# Altium PCB POE.PcbDoc (part 1 of 2)
Units mm, origin at the board's own origin, x right, y up, seen from the top; angles counter-clockwise.
Board outline 57 x 14 mm, 4 copper layers (Top Layer, Layer 1, Layer 2, Bottom Layer), stack 1.571 mm thick; 65 components, 45 nets, 184 pads, 214 vias.
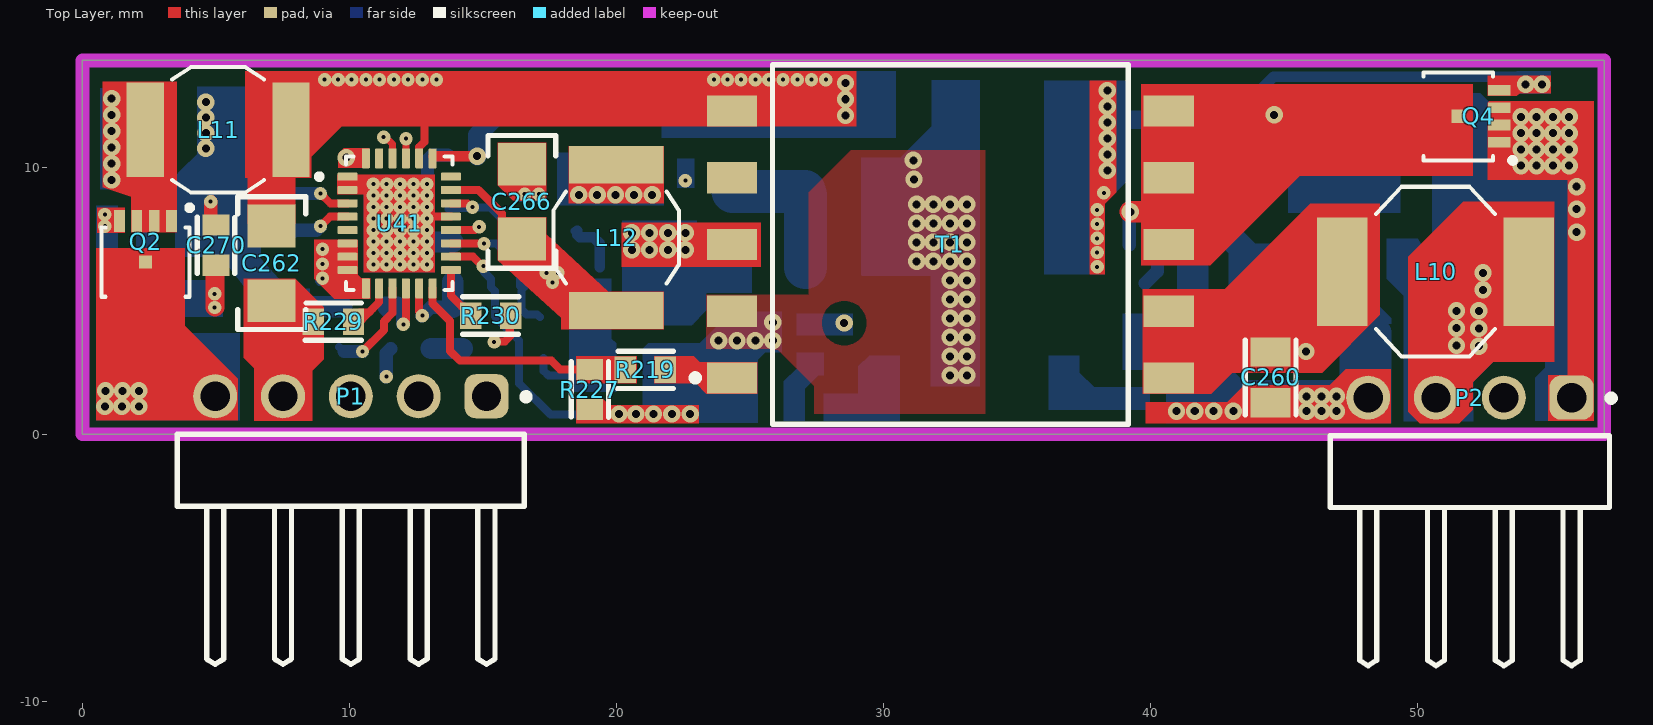
[diagram p0: Top Layer view]
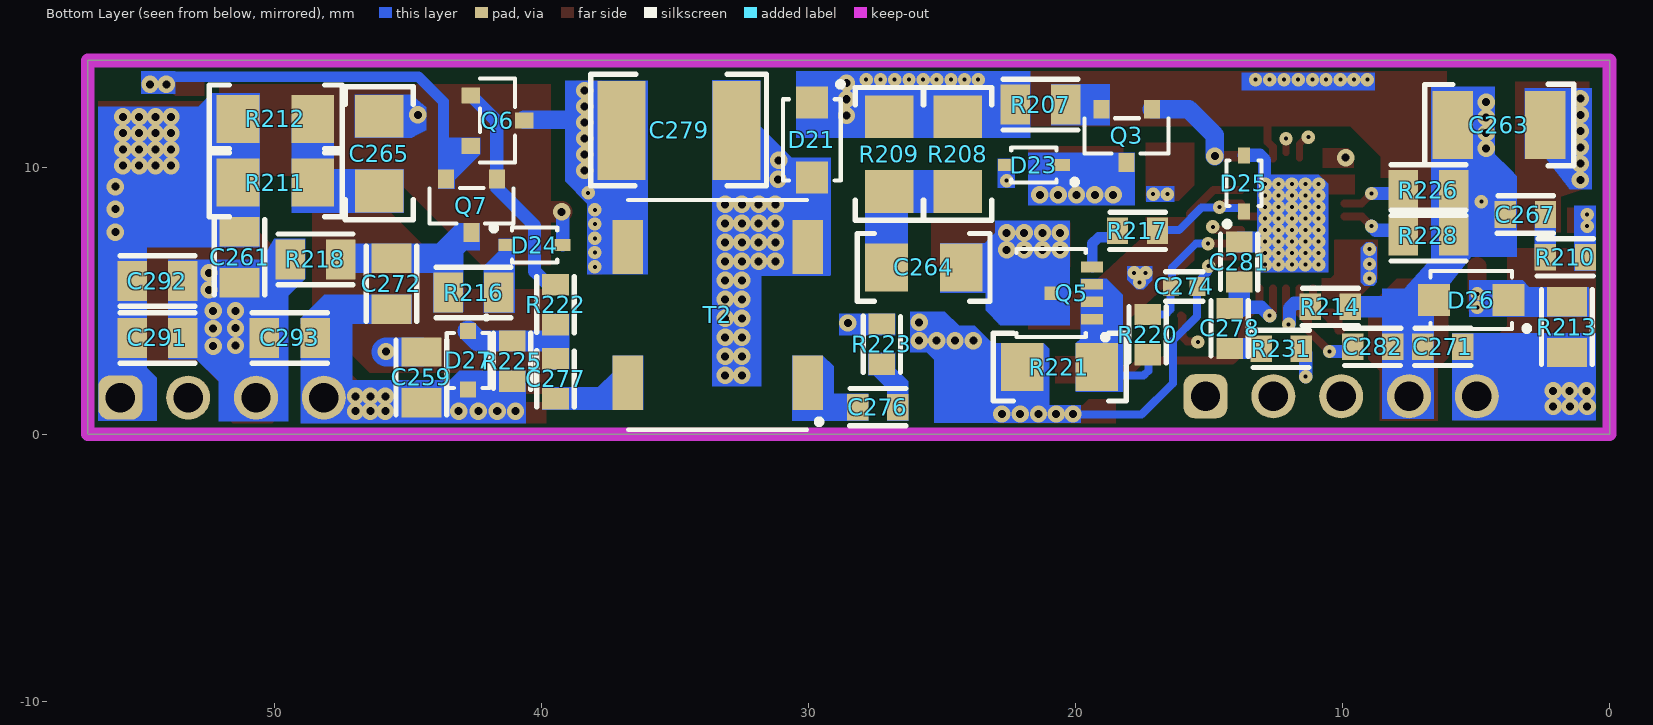
[diagram p1: Bottom Layer view, seen from below]
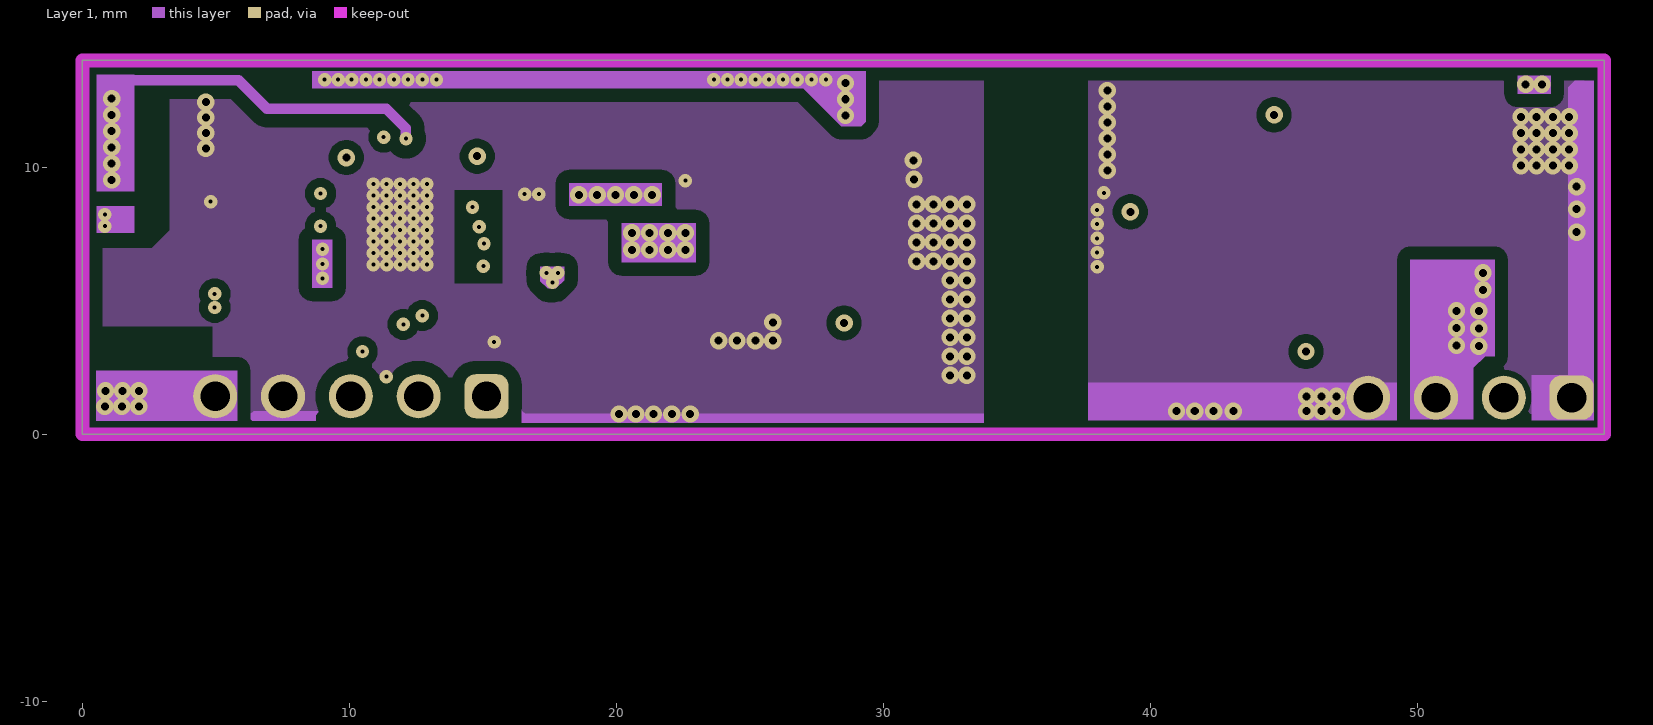
[diagram p2: Layer 1]
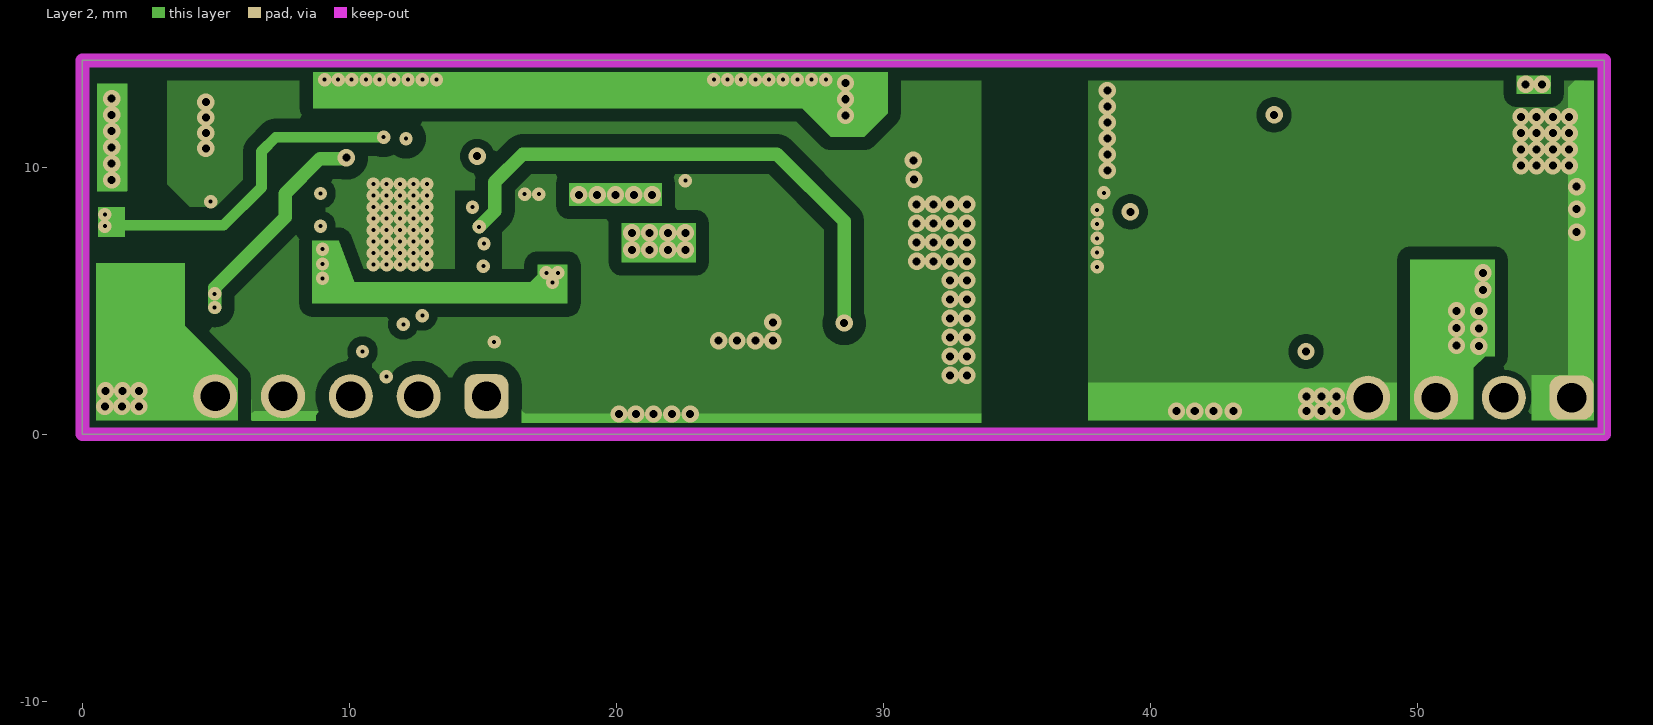
[diagram p3: Layer 2]
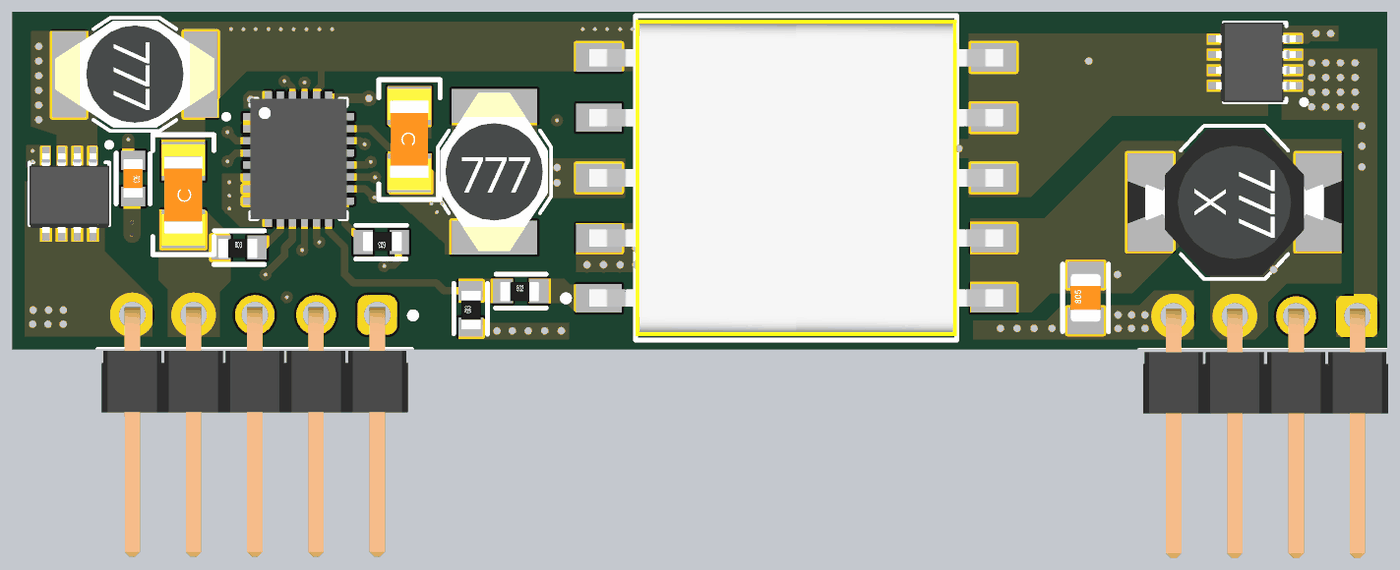
[diagram p4: 3D render of the assembled board from above, using the file's embedded part models]
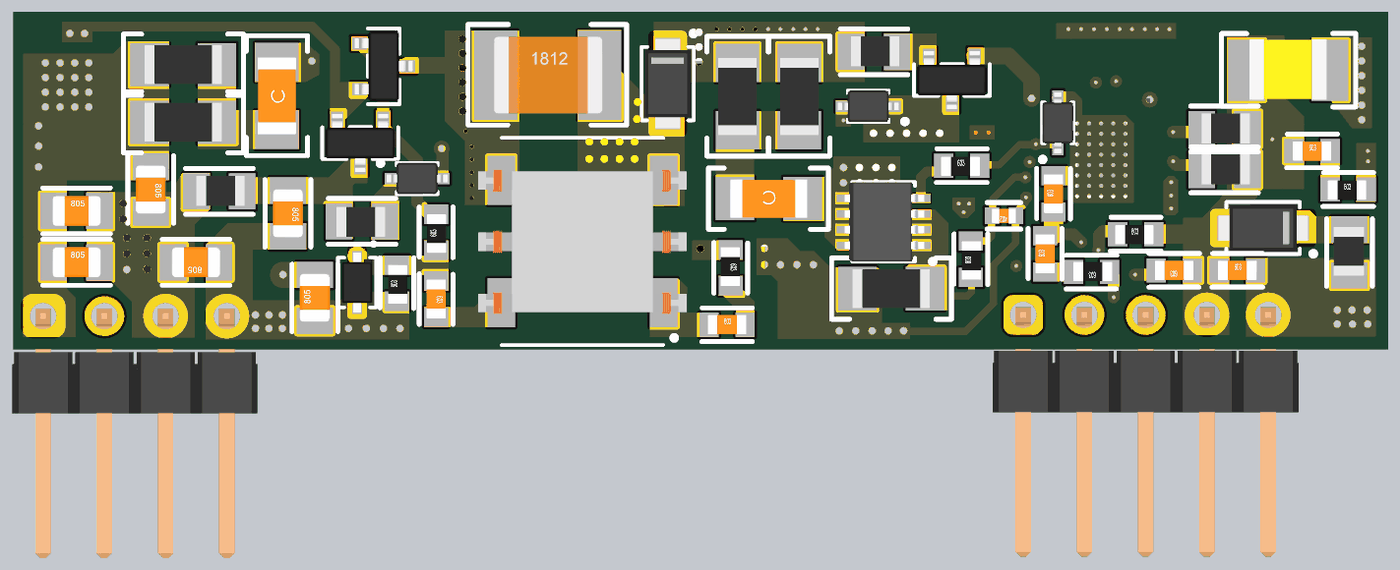
[diagram p5: 3D render of the assembled board from below, using the file's embedded part models]

## Layer stack, top to bottom
Top Solder: solder mask 0.0102, Solder Resist, Dk 3.5
Top Layer: signal copper 0.0356
Dielectric 2: prepreg 0.18, PR7628, Dk 4.1
Dielectric 4: prepreg 0.18, PR7628, Dk 4.1
Layer 1: signal copper 0.035
Dielectric 1: core 0.71, FR4-Improved, Dk 4.6
Layer 2: signal copper 0.035
Dielectric 5: prepreg 0.18, PR7628, Dk 4.1
Dielectric 3: prepreg 0.18, PR7628, Dk 4.1
Bottom Layer: signal copper 0.0356
Bottom Solder: solder mask 0.0102, Solder Resist, Dk 3.5

## Board outline
0,0 0,14 57,14 57,0

## Design rules (kind name [scope] priority, off if disabled: settings)
BoardOutlineClearance Edge_Via_Clearance_Top [OnLayer('Top Layer')] p1: gap=0.3 ignorepadtopadclearanceinfootprint=FALSE
BoardOutlineClearance Edge_Via_Clearance_Bottom [OnLayer('Bottom Layer')] p2: gap=0.3 ignorepadtopadclearanceinfootprint=FALSE
BoardOutlineClearance Edge_Via_Clearance_L1 [OnLayer('Layer 1')] p3: gap=0.4 ignorepadtopadclearanceinfootprint=FALSE
BoardOutlineClearance Edge_Via_Clearance_L2 [OnLayer('Layer 2')] p4: gap=0.4 ignorepadtopadclearanceinfootprint=FALSE
Clearance Clearance_TOP_POE_GND [InNamedPolygon('TOP_POE_GND')] p1: gap=0.5 ignorepadtopadclearanceinfootprint=FALSE
Clearance Clearance_L1_POE_GND [InNamedPolygon('L1_POE_GND')] p2: gap=0.5 ignorepadtopadclearanceinfootprint=FALSE
Clearance Clearance_L2_POE_GND [InNamedPolygon('L2_POE_GND')] p3: gap=0.5 ignorepadtopadclearanceinfootprint=FALSE
Clearance Clearance_L1_GND [InNamedPolygon('L1_GND')] p4: gap=0.5 ignorepadtopadclearanceinfootprint=FALSE
Clearance Clearance_L2_GND [InNamedPolygon('L2_GND')] p5: gap=0.5 ignorepadtopadclearanceinfootprint=FALSE
Clearance [All] p6: gap=0.15 ignorepadtopadclearanceinfootprint=FALSE
HoleSize [All] p1: absolutevalues=TRUE maxlimit=2.54 minlimit=0.15 maxpercent=80.000 minpercent=20.000
HoleToHoleClearance [All] p1: gap=0.25 allowstackedmicrovias=TRUE
MinimumAnnularRing [All] p1: minimumring=0.125
MinimumSolderMaskSliver [All] p1: minsoldermaskwidth=0.07
NetAntennae [All] p1: netantennaetolerance=1.7
PlaneClearance [All] p1: clearance=0.5
PlaneConnect [All] p1: planeconnectstyle=Direct reliefexpansion=0.508 reliefentries=4 reliefconductorwidth=0.254 reliefairgap=0.254
PolygonConnect [All] p1: connectstyle=Direct reliefconductorwidth=0.254 reliefentries=4 polygonreliefangle="90 Angle" airgapwidth=0.254
RoutingVias [All] p1: holewidth=0.15 width=1.27 viastyle="Through Hole" minholewidth=0.15 minwidth=0.252 maxholewidth=0.8 maxwidth=1.27
SilkToSilkClearance [All] p1: silktosilkclearance=0.102
SilkToSolderMaskClearance [IsPad] p1: minsilkscreentomaskgap=0.1 clearancetoexposedcopper=TRUE
SolderMaskExpansion [All] p1: expansion=0.102 istentingtop=FALSE
Width [All] p1: maxlimit=4 minlimit=0.254 preferedwidth=0.254 minimp=50.000000 maximp=50.000000 favimp=50.000000
22 further rules are at their usual default settings.

## Components (designator, comment, footprint, x,y, rotation, side; value= is the part's Value field where it differs from the comment)
C259 "10uF" C0805 44.501,2.134 r90 bottom
C260 "10uF" C0805 44.501,2.134 r90 top
C261 "10uF" C0805 51.308,6.629 r270 bottom
C262 "2.2uF" C1206 7.087,6.401 r90 top
C263 "10uF" C1210 4.14,11.582 r180 bottom
C264 "100pF" C1206 25.679,6.248 r0 bottom
C265 "470pF" C1206 46.076,10.516 r90 bottom
C266 "10uF" C1206 16.459,8.712 r270 top
C267 "10nF" C0603 3.15,8.23 r180 bottom
C270 "47nF" C0603 5.004,7.087 r270 top
C271 "100nF" C0603 6.248,3.277 r180 bottom
C272 "1uF" C0805 45.618,5.639 r270 bottom
C274 "DNP" C0402 15.926,5.537 r0 bottom value=10nF
C276 "1uF" C0603 27.407,1.016 r180 bottom
C277 "2.2nF" C0603 39.472,2.083 r270 bottom
C278 "3.3nF" C0603 14.224,3.962 r90 bottom
C279 "4.7nF" C1812 34.849,11.379 r180 bottom
C281 "220pF" C0603 13.868,6.452 r90 bottom
C282 "100nF" C0603 8.865,3.277 r0 bottom
C291 "10uF" C0805 54.381,3.607 r180 bottom
C292 "10uF" C0805 54.381,5.74 r180 bottom
C293 "10uF" C0805 49.428,3.607 r0 bottom
D21 "PTVS58VS1UR" SOD123W 29.87,11.024 r270 bottom
D23 "BAV19WS" SOD323 21.556,10.084 r0 bottom
D24 "DNP" SOD323 40.259,7.087 r180 bottom
D25 "PMEG1020EA" SOD323 13.691,9.398 r90 bottom
D26 "PTVS58VS1UR" SOD123W 5.182,5.029 r0 bottom
D27 "BAT46WJ" SOD323F 42.748,2.769 r270 bottom
L10 "180 nH" IND_DO1813H_COC 50.673,6.096 r180 top
L11 "10 uH" IND_DO1607B_COC 5.08,11.405 r180 top
L12 "100 uH" IND_DO1607B_COC 19.99,7.366 r270 top
P1 "61300511021" 61300511021 10.05,-1.346 r0 top
P2 "61300411021" 61300411021 51.96,-1.397 r0 top
Q2 "PSMN075-100MSE" SOT1210 2.362,6.452 r270 top
Q3 "PBSS9110T" SOT23 18.085,11.227 r0 bottom
Q4 "TPN1600ANH" SOT1210 51.526,11.907 r180 top
Q5 "BSZ900N20NS3" SOT1210 20.915,5.288 r0 bottom
Q6 "MMBT3906" SOT23 41.697,11.745 r270 bottom
Q7 "MMBT3904" SOT23 42.621,8.611 r0 bottom
R207 "20R" R0805 21.311,12.344 r0 bottom
R208 "200R" R1206 24.409,10.49 r90 bottom
R209 "200R" R1206 26.975,10.49 r90 bottom
R210 "3.3k" R0603 1.651,6.629 r180 bottom
R211 "27R" R1206 49.962,9.423 r180 bottom
R212 "27R" R1206 49.962,11.811 r180 bottom
R213 "8.2R" R0805 1.6,4.013 r270 bottom
R214 "7.5k" R0603 10.465,4.775 r180 bottom
R216 "DNP" R0805 42.545,5.309 r180 bottom value=1k
R217 "0R" R0603 17.678,7.62 r180 bottom
R218 "0R" R0805 48.463,6.553 r0 bottom
R219 "6.65k" R0603 21.082,2.413 r0 top
R220 "0R" R0603 17.297,3.734 r90 bottom
R221 "0.025R" R1206 20.599,2.515 r180 bottom
R222 "15R" R0603 39.472,4.851 r90 bottom
R223 "100R" R0603 27.254,3.378 r270 bottom
R225 "10k" R0603 41.097,2.743 r90 bottom
R226 "37.4R" R0805 6.782,9.144 r0 bottom
R227 "2.2k" R0603 18.999,1.676 r90 top
R228 "1k" R0805 6.782,7.442 r0 bottom
R229 "107k" R0603 9.398,4.216 r0 top
R230 "DNP" R0603 15.291,4.445 r180 top value=51k
R231 "26.1k" R0603 12.294,3.2 r0 bottom
T1 "750316115" WE-PoE+_EP13_L17.75W13.46H12.7 32.5,7.112 r0 top
T2 "PE-68386NLT" SOP254P864X249-6N 33.401,4.47 r0 bottom
U41 "LT4295IUFD" QFN-29_UFD 11.862,7.899 r0 top

## Footprints (in the part's own frame and the unit in brackets; to place one, negate y for a bottom-side part, rotate by r counter-clockwise, add the part's x,y. Pads: shape width x height; smd on the part's side, far side on the other; paste and mask are expansions set on the pad)
61300411021 [mm]
  rrect50% 1.65x1.65 hole 1.1: 1(3.81,2.77)
  round 1.65 hole 1.1: 2(1.27,2.77) 3(-1.27,2.77) 4(-3.81,2.77)
  silkscreen extent -5.23,-7.27 5.42,2.87, body extent -5.08,-7.27 5.08,3.09, height 2.58
61300511021 [mm]
  rrect50% 1.65x1.65 hole 1.1: 1(5.08,2.77)
  round 1.65 hole 1.1: 2(2.54,2.77) 3(0,2.77) 4(-2.54,2.77) 5(-5.08,2.77)
  silkscreen extent -6.5,-7.27 6.69,2.87, body extent -6.35,-7.27 6.35,3.09, height 2.58
C0402 [mm]
  rect 0.6x0.7 smd: 1(-0.5,0) 2(0.5,0)
  silkscreen extent -0.7,-0.55 0.7,0.55, body extent -0.5,-0.3 0.5,0.3, height 0.2
C0603 [mm]
  rect 0.8x1 smd: 1(-0.75,0) 2(0.75,0)
  silkscreen extent -1.05,-0.7 1.05,0.7, body extent -0.8,-0.4 0.8,0.4, height 0.3
C0805 [mm]
  rect 1.1x1.5 smd: 1(-0.95,0) 2(0.95,0)
  silkscreen extent -1.4,-0.95 1.4,0.95, body extent -1,-0.63 1,0.63, height 0.78
C1206 [mm]
  rect 1.6x1.8 smd: 1(-1.4,0) 2(1.4,0)
  silkscreen extent -2.47,-1.27 2.5,1.27, body extent -2.1,-0.9 2.1,0.9, height 0.95
C1210 [mm]
  rect 1.52x2.54 smd: 1(-1.73,0) 2(1.73,0)
  silkscreen extent -2.78,-1.53 2.8,1.53, body extent -1.61,-1.22 1.59,1.28, height 2.5
C1812 [mm]
  rect 1.8x3.7 smd: 1(-2.15,0) 2(2.15,0)
  silkscreen extent -3.3,-2.07 3.27,2.1, body extent -2.22,-1.6 2.28,1.6, height 1.6
IND_DO1607B_COC [mil]
  rect 55x140 smd paste+0: 1(-107.5,0) 2(107.5,0)
  silkscreen extent -68,-92 68,92, body extent -130,-88 130,87, height 115
IND_DO1813H_COC [mil]
  rect 75x160 smd paste+0: 1(-137.5,0) 2(137.5,0)
  silkscreen extent -88,-125 88,125, body extent -175,-120 175,120, height 197
QFN-29_UFD [mm]
  rrect25% 0.75x0.3 smd: 1(-1.935,1.75) 2(-1.935,1.25) 3(-1.935,0.75) 4(-1.935,0.25) 5(-1.935,-0.25) 6(-1.935,-0.75) 7(-1.935,-1.25) 8(-1.935,-1.75) 15(1.935,-1.75) 16(1.935,-1.25) 17(1.935,-0.75) 18(1.935,-0.25) 19(1.935,0.25) 20(1.935,0.75) 21(1.935,1.25) 22(1.935,1.75)
  rrect25% 0.3x0.75 smd: 9(-1.25,-2.435) 10(-0.75,-2.435) 11(-0.25,-2.435) 12(0.25,-2.435) 13(0.75,-2.435) 14(1.25,-2.435) 23(1.25,2.435) 24(0.75,2.435) 25(0.25,2.435) 26(-0.25,2.435) 27(-0.75,2.435) 28(-1.25,2.435)
  rect 0.3x0.3 smd paste-2539.97: 29(0,0)
  Top Layer region: 1.325,-1.825 -1.325,-1.825 -1.325,1.475 -0.975,1.825 1.325,1.825
  silkscreen extent -3.09,-2.5 2,2.5, body extent -2,-2.5 2,2.5, height 0.8
R0603 [mm]
  rect 0.8x1 smd: 1(-0.75,0) 2(0.75,0)
  silkscreen extent -1.05,-0.7 1.05,0.7, body extent -0.85,-0.43 0.75,0.37, height 0.3
R0805 [mm]
  rect 1.1x1.5 smd: 1(-0.95,0) 2(0.95,0)
  silkscreen extent -1.4,-0.95 1.4,0.95, body extent -1.05,-0.65 0.95,0.6, height 0.4
R1206 [mm]
  rect 1.6x1.8 smd: 1(-1.4,0) 2(1.4,0)
  silkscreen extent -2.47,-1.27 2.5,1.27, body extent -1.6,-0.8 1.6,0.8, height 0.5
SOD123W [mm]
  rect 1.2x1.2 smd paste-0.1 mask+0.2: 1(-1.4,0) 2(1.4,0)
  silkscreen extent -2.18,-1.08 1.52,1.17, body extent -1.85,-0.95 1.85,0.95, height 1.1
SOD323 [mm]
  rect 0.6x0.46 smd: 1(-1.05,0) 2(1.05,0)
  silkscreen extent -1.62,-0.65 0.85,0.73, body extent -1.26,-0.65 1.26,0.65, height 1.11
SOD323F [mm]
  rect 0.6x0.6 smd paste-0.1: 1(-1.1,0) 2(1.1,0)
  silkscreen extent -1.63,-0.8 1.03,0.8, body extent -1.25,-0.63 1.25,0.62, height 0.69
SOP254P864X249-6N [mil]
  rect 45x80 smd: 1(-132.5,100) 3(-132.5,-100) 4(132.5,-100) 6(132.5,100)
  silkscreen extent -154,-169 132,169, body extent -170,-118 170,119, height 90
SOT23 [mm]
  rect 0.6x0.7 smd paste-0.05: 1(-0.95,-0.949) 2(0.95,-0.949) 3(0,1.051)
  silkscreen extent -1.57,-0.61 1.57,0.71, body extent -1.45,-1.15 1.45,1.25, height 0.94
SOT1210 [mm]
  rect 0.83x0.4 smd paste-1 mask+0.05: 1(-1.535,0.975) 2(-1.535,0.325) 3(-1.535,-0.325) 4(-1.535,-0.975)
  rect 0.5x0.5 smd paste-1 mask+0: MB(0,0)
  Top Layer region: 1.95,0.775 1.33,0.775 1.33,0.525 1.95,0.525 1.95,0.125 1.33,0.125 1.33,-0.125 1.95,-0.125 1.95,-0.525 1.33,-0.525 1.33,-0.775 1.95,-0.775 1.95,-1.175 1.2,-1.175 1.2,-1.125 -0.52,-1.125 -0.52,1.125 1.2,1.125 1.2,1.175 1.95,1.175
  silkscreen extent -2.13,-1.65 1.3,1.75, body extent -1.68,-1.65 1.62,1.65, height 0.9
WE-PoE+_EP13_L17.75W13.46H12.7 [mm] "Power over Ethernet Plus Transformer, EP13, body 17.75 x 13.46 mm"
  rect 1.88x1.17 smd: 1(-8.18,-5) 2(-8.18,-2.5) 3(-8.18,0) 4(-8.18,2.5) 5(-8.18,5) 6(8.18,5) 7(8.18,2.5) 8(8.18,0) 9(8.18,-2.5) 10(8.18,-5)
  silkscreen extent -9.67,-6.73 6.66,6.73, body extent -8.58,-6.56 8.58,6.56, height 11.99

## Part data
C259 C260 C261 C291 C292 C293: library part C0805_10uF_50V_10%_X5R, "Multilayer Ceramic Capacitors MLCC - SMD/SMT 10uF 50V X5R C0805 10 %", Temperature Coefficient=X5R, Tolerance=10%, Voltage Rating=50V, Assembly=SMT, Category=MLCC, Component Height=0.45mm, Manufacturer Part Number=C0805_10uF_50V_10%_X5R, Part Number=C0805_10uF_50V_10%_X5R, Pin Count=2
C262: library part C1206_2.2uF_100V_10%_X7R, "Multilayer Ceramic Capacitors MLCC - SMD/SMT 2.2uF 100V X7R 1206 10%", Temperature Coefficient=X7R, Tolerance=10%, Voltage Rating=100V, Assembly=SMT, Category=MLCC, Component Height=1.6mm, Manufacturer Part Number=C1206_2.2uF_100V_10%_X7R, Part Number=C1206_2.2uF_100V_10%_X7R, Pin Count=2
C263: library part C1210_10uF_100V_10%_X7S, "Multilayer Ceramic Capacitors MLCC - SMD/SMT 10uF 100V X7S 1210 10%", Temperature Coefficient=X7S, Tolerance=10%, Voltage Rating=100V, Assembly=SMT, Category=MLCC, Component Height=2mm, Manufacturer Part Number=C1210_10uF_100V_10%_X7S, Part Number=C1210_10uF_100V_10%_X7S, Pin Count=2
C264: library part C1206_100pF_630V_5%_U2J, "Multilayer Ceramic Capacitors MLCC - SMD/SMT 100pF 630V U2J 1206 5%", Temperature Coefficient=U2J, Tolerance=5%, Voltage Rating=630V, Assembly=SMT, Category=MLCC, Component Height=0.55mm, Manufacturer Part Number=C1206_100pF_630V_5%_U2J, Part Number=C1206_100pF_630V_5%_U2J, Pin Count=2
C265: library part C1206_470pF_630V_5%_U2J, "Multilayer Ceramic Capacitors MLCC - SMD/SMT 470pF 630V U2J 1206 5%", Temperature Coefficient=U2J, Tolerance=5%, Voltage Rating=630V, Assembly=SMT, Category=MLCC, Component Height=0.55mm, Manufacturer Part Number=C1206_470pF_630V_5%_U2J, Part Number=C1206_470pF_630V_5%_U2J, Pin Count=2
C266: library part C1206_10uF_25V_10%_X7R, "Multilayer Ceramic Capacitors MLCC - SMD/SMT 10uF 25V X7R 1206  10%", Temperature Coefficient=X7R, Tolerance=10%, Voltage Rating=25V, Assembly=SMT, Category=MLCC, Component Height=0.55mm, Manufacturer Part Number=C1206_10uF_25V_10%_X7R, Part Number=C1206_10uF_25V_10%_X7R, Pin Count=2
C267: library part C0603_10nF_100V_10%_X7R, "Multilayer Ceramic Capacitors MLCC - SMD/SMT 0.01uF 100V X7R 0603 10%", Temperature Coefficient=X7R, Tolerance=10%, Voltage Rating=100V, Assembly=SMT, Category=MLCC, Component Height=0.45mm, Manufacturer Part Number=C0603_10nF_100V_10%_X7R, Part Number=C0603_10nF_100V_10%_X7R, Pin Count=2
C270: library part C0603_47nF_100V_20%_X7R, "Multilayer Ceramic Capacitors MLCC - SMD/SMT 0.047uF 100V X7R 0603 20%", Temperature Coefficient=X7R, Tolerance=20%, Voltage Rating=100V, Assembly=SMT, Category=MLCC, Component Height=0.45mm, Manufacturer Part Number=C0603_47nF_100V_20%_X7R, Part Number=C0603_47nF_100V_20%_X7R, Pin Count=2
C271 C282: library part C0603_100nF_100V_10%_X7R, "Multilayer Ceramic Capacitors MLCC - SMD/SMT 0.1uF 25V X7R 0603 10%", Temperature Coefficient=X7R, Tolerance=10%, Voltage Rating=100V, Assembly=SMT, Category=MLCC, Component Height=0.45mm, Manufacturer Part Number=C0603_100nF_100V_10%_X7R, Part Number=C0603_100nF_100V_10%_X7R, Pin Count=2
C272: library part C0805_1uF_25V_10%_X7R, "Multilayer Ceramic Capacitors MLCC - SMD/SMT 1uF 25V X7R 0805 10%", Temperature Coefficient=X7R, Tolerance=10%, Voltage Rating=25V, Assembly=SMT, Category=MLCC, Component Height=0.45mm, Manufacturer Part Number=C0805_1uF_25V_10%_X7R, Part Number=C0805_1uF_25V_10%_X7R, Pin Count=2
C274: library part C0402_10nF_100V_20%_X5R, "Multilayer Ceramic Capacitors MLCC - SMD/SMT 10nF 100V X5R C0402 20 %", Temperature Coefficient=X5R, Tolerance=20%, Voltage Rating=100V, Assembly=SMT, Category=MLCC, Component Height=0.35mm, Manufacturer Part Number=C0402_10nF_100V_20%_X5R, Part Number=C0402_10nF_100V_20%_X5R, Pin Count=2
C276: library part C0603_1uF_25V_10%_X7R, "Multilayer Ceramic Capacitors MLCC - SMD/SMT 1uF 25V X7R 0603 10%", Temperature Coefficient=X7R, Tolerance=10%, Voltage Rating=25V, Assembly=SMT, Category=MLCC, Component Height=0.45mm, Manufacturer Part Number=C0603_1uF_25V_10%_X7R, Part Number=C0603_1uF_25V_10%_X7R, Pin Count=2
C277: library part C0603_2.2nF_25V_10%_X7R, "Multilayer Ceramic Capacitors MLCC - SMD/SMT 2200pF 25V X7R 0603 10%", Temperature Coefficient=X7R, Tolerance=10%, Voltage Rating=25V, Assembly=SMT, Category=MLCC, Component Height=0.45mm, Manufacturer Part Number=C0603_2.2nF_25V_10%_X7R, Part Number=C0603_2.2nF_25V_10%_X7R, Pin Count=2
C278: library part C0603_3.3nF_25V_10%_X7R, "Multilayer Ceramic Capacitors MLCC - SMD/SMT 3300pF 25V X7R 0603 10%", Temperature Coefficient=X7R, Tolerance=10%, Voltage Rating=25V, Assembly=SMT, Category=MLCC, Component Height=0.45mm, Manufacturer Part Number=C0603_3.3nF_25V_10%_X7R, Part Number=C0603_3.3nF_25V_10%_X7R, Pin Count=2
C279: library part C1812_4.7nF_2kV_10%_X7R, "Multilayer Ceramic Capacitors MLCC - SMD/SMT 4700pF 2kV X7R 1812 10%", Temperature Coefficient=X7R, Tolerance=10%, Voltage Rating=2kV, Assembly=SMT, Category=MLCC, Component Height=0.55mm, Manufacturer Part Number=C1812_4.7nF_2kV_10%_X7R, Part Number=C1812_4.7nF_2kV_10%_X7R, Pin Count=2
C281: library part C0603_220pF_25V_10%_X7R, "Multilayer Ceramic Capacitors MLCC - SMD/SMT 220pF 25V X7R 0603 10%", Temperature Coefficient=X7R, Tolerance=10%, Voltage Rating=25V, Assembly=SMT, Category=MLCC, Component Height=0.45mm, Manufacturer Part Number=C0603_220pF_25V_10%_X7R, Part Number=C0603_220pF_25V_10%_X7R, Pin Count=2
D21 D26: "ESD Protection Diodes / TVS Diodes PTVS58VS1UR/SOD123W/SOD2", Manufacturer=NEXPERIA, Manufacturer Part Number=PTVS58VS1UR,115, Package=SOD123, Reverse Voltage Vrrm=58V, Assembly=SMT, Availability=Unavailable, Category=TVS, Datasheet=https://assets.nexperia.com/documents/data-sheet/PTVSXS1UR_SER.pdf, MP=MMSZ5252BS-7-F, Part Number=PTVS58VS1UR, Pin Count=2, Price=None
D23: "Small Signal Switching Diodes 120V 250mW", Forward Current If="200 mA", Manufacturer="Diodes Inc.", Manufacturer Part Number=BAV19WS-7-F, Package=SOD323, Reverse Voltage Vrrm=120V, Assembly=SMT, Category=Diode, Datasheet=https://www.diodes.com/part/view/BAV19WS#, Part Number=BAV19WS, Pin Count=2
D24: library part Schottky_DNP, "Schottky 40V", Package=SOD323, Reverse Voltage Vrrm=40V, Assembly=SMT, Category=Schottky, Part Number=Schottky_DNP, Pin Count=2
D25: "Schottky Diodes & Rectifiers PMEG1020EA/SOD323/SOD2", Forward Current If=2A, Manufacturer=Nexperia, Package=SOD323, Reverse Voltage Vrrm=10V, Assembly=SMT, Category=Schottky, Datasheet=https://assets.nexperia.com/documents/data-sheet/PMEG1020EA.pdf, Manufacturer Part Number=PMEG1020EA, Part Number=PMEG1020EA, Pin Count=2
D27: "100 V, Schottky Diodes & Rectifiers BAT46WJ/SOD323F/SOD323F", Forward Current If="250 mA", Manufacturer=Nexperia, Manufacturer Part Number=BAT46WJ,115, Package=SOD323F, Reverse Voltage Vrrm=100V, Assembly=SMT, Category=Schottky, Datasheet=https://assets.nexperia.com/documents/data-sheet/BAT46WJ.pdf, Part Number=BAT46WJ, Pin Count=2
L10: library part DO1813H-181, "Power Inductors - SMD 180nH Unshld 20% 10A 3mOhms", Manufacturer=Coilcraft, Manufacturer Part Number=DO1813H-181MLD, Max DC Current="10 A", Max DC Resistance="0.0030 Ohms", Saturation Current="14 A", Self Resonant Frequency="800 MHz", Assembly=SMT, Category=Inductor, Component Height=5mm, Datasheet=https://www.coilcraft.com/getmedia/eceb5548-303f-4cbf-872a-303f3b222949/do1813h.pdf, Inductance="180 nH", Part Number=DO1813H-181, Pin Count=2
L11: library part DO1608C-103, "Power Inductors - SMD 10uH Shld 20% 1.5A 160mOhms", Manufacturer=Coilcraft, Manufacturer Part Number=DO1608C-103MLC, Max DC Current=1.5A, Max DC Resistance="160 mOhms", Saturation Current="1.1 A", Self Resonant Frequency="35 MHz", Assembly=SMT, Category=Inductor, Datasheet=https://www.coilcraft.com/getmedia/4cc14c66-6f6e-44d5-bdfa-285965aec659/do1608c.pdf, Inductance="10 uH", Part Number=DO1608C-103, Pin Count=2
L12: library part DO1608C-104, "Power Inductors - SMD 10uH Shld 20% 1.5A 160mOhms", Manufacturer=Coilcraft, Manufacturer Part Number=DO1608C-103MLC, Max DC Current="500 mA", Max DC Resistance="1.27 Ohms", Saturation Current="310 mA", Self Resonant Frequency="9 MHz", Assembly=SMT, Category=Inductor, Component Height=2.92mm, Datasheet=https://www.coilcraft.com/getmedia/4cc14c66-6f6e-44d5-bdfa-285965aec659/do1608c.pdf, Inductance="100 uH", Part Number=DO1608C-104, Pin Count=2
P1: "Pin Header, pitch 2.54 mm,PTH, Right Angle, single row, 5p, gold contact plating, 3A current rating", Manufacturer="Wurth Electronics", Voltage Rating=250V, Assembly=SMT, Category="Pin Header-RA", Component Height=9.6mm, Datasheet=https://www.we-online.com/components/products/datasheet/61001221121.pdf, Manufacturer Part Number=61300511021, Part Number=61300511021, Pin Count=5
P2: "Pin Header, pitch 2.54 mm,PTH, Right Angle, single row, 4p, gold contact plating, 3A current rating", Manufacturer="Wurth Electronics", Voltage Rating=500V, Assembly=SMT, Category="Pin Header-RA", Component Height=9.6mm, Datasheet=https://www.we-online.com/components/products/datasheet/61001221121.pdf, Manufacturer Part Number=61300411021, Part Number=61300411021, Pin Count=4
Q2: library part PSMN075-100MSEX, "N-Channel 100V 18A (Tj) 65W (Tc) Surface Mount LFPAK33", Drain Current=18A, Manufacturer=NEXPERIA, Power Rating=65W, Voltage Rated=100V, Assembly=SMT, Category=Mosfet, Datasheet=https://assets.nexperia.com/documents/data-sheet/PSMN075-100MSE.pdf, Manufacturer Part Number=PSMN075-100MSEX, Part Number=PSMN075-100MSEX, Pin Count=8
Q3: "Trans GP BJT PNP 100V 300mW 1 A 3-Pin SOT-23", Manufacturer=NEXPERIA, Power Rating="300 mW", Voltage Rated=100V, Assembly=SMT, Category=BJT, Datasheet=https://assets.nexperia.com/documents/data-sheet/PBSS9110T.pdf, Manufacturer Part Number=PBSS9110T, Part Number=PBSS9110T, Pin Count=3
Q4: "Silicon N-channel MOS, 100V, 18A", Drain Current=18A, Manufacturer=Toshiba, Power Rating=42W, Voltage Rated=100V, Assembly=SMT, Category=Mosfet, Component Height=0.85mm, Datasheet=https://toshiba.semicon-storage.com/info/TPN1600ANH_datasheet_en_20191018.pdf?did=13538&prodName=TPN1600ANH, Manufacturer Part Number=TPN1600ANH, Part Number=TPN1600ANH, Pin Count=8
Q5: "MOSFETs N-Ch 200V 15.2A TDSON-8 OptiMOS 3", Drain Current=15.2A, Manufacturer=Infineon, Manufacturer Part Number=BSZ900N20NS3GATMA1, Power Rating=15.2W, Voltage Rated=200V, Assembly=SMT, Category=Mosfet, Datasheet=https://www.infineon.com/dgdl/Infineon-BSZ900N20NS3-DS-v02_02-en.pdf?fileId=db3a30432ad629a6012b15f1be561a9b, Part Number=BSZ900N20NS3, Pin Count=8
Q6: "Trans GP BJT PNP 40V 3-Pin SOT-23", Manufacturer=NEXPERIA, Power Rating=200mW, Voltage Rated=40V, Assembly=SMT, Category=BJT, Datasheet=https://assets.nexperia.com/documents/data-sheet/MMBT3906.pdf, Manufacturer Part Number=MMBT3906, Part Number=MMBT3906, Pin Count=3
Q7: "Trans GP BJT NPN 40V 3-Pin SOT-23", Manufacturer=NEXPERIA, Power Rating=200mW, Voltage Rated=40V, Assembly=SMT, Category=BJT, Datasheet=https://assets.nexperia.com/documents/data-sheet/MMBT3904.pdf, Manufacturer Part Number=MMBT3904, Part Number=MMBT3904, Pin Count=3
R207: library part R0805_20R_1%_62.5mW_100PPM_150V, "resistor", Power Rating=62.5mW, Temperature Coefficient=±100ppm/°C, Tolerance=1%, Voltage Rating=150V, Assembly=SMT, Category="Film Resistor", Manufacturer Part Number=R0805_20R_1%_62.5mW_100PPM_150V, Part Number=R0805_20R_1%_62.5mW_100PPM_150V, Pin Count=2
R208 R209: library part R1206_200R_1%_250mW_100PPM_200V, "resistor", Power Rating=250mW, Temperature Coefficient=±100ppm/°C, Tolerance=1%, Voltage Rating=200V, Assembly=SMT, Category="Film Resistor", Manufacturer Part Number=R1206_200R_1%_250mW_100PPM_200V, Part Number=R1206_200R_1%_250mW_100PPM_200V, Pin Count=2
R210: library part R0603_3.3k_1%_62.5mW_100PPM_75V, "resistor", Power Rating=62.5mW, Temperature Coefficient=±100ppm/°C, Tolerance=1%, Voltage Rating=75V, Assembly=SMT, Category="Film Resistor", Manufacturer Part Number=R0603_3.3k_1%_62.5mW_100PPM_75V, Part Number=R0603_3.3k_1%_62.5mW_100PPM_75V, Pin Count=2
R211 R212: library part R1206_27R_1%_250mW_100PPM_200V, "resistor", Power Rating=250mW, Temperature Coefficient=±100ppm/°C, Tolerance=1%, Voltage Rating=200V, Assembly=SMT, Category="Film Resistor", Manufacturer Part Number=R1206_27R_1%_250mW_100PPM_200V, Part Number=R1206_27R_1%_250mW_100PPM_200V, Pin Count=2
R213: library part R0805_8.2R_1%_62.5mW_100PPM_150V, "resistor", Power Rating=62.5mW, Temperature Coefficient=±100ppm/°C, Tolerance=1%, Voltage Rating=150V, Assembly=SMT, Category="Film Resistor", Manufacturer Part Number=R0805_8.2R_1%_62.5mW_100PPM_150V, Part Number=R0805_8.2R_1%_62.5mW_100PPM_150V, Pin Count=2
R214: library part R0603_7.5k_1%_62.5mW_100PPM_75V, "resistor", Power Rating=62.5mW, Temperature Coefficient=±100ppm/°C, Tolerance=1%, Voltage Rating=75V, Assembly=SMT, Category="Film Resistor", Manufacturer Part Number=R0603_7.5k_1%_62.5mW_100PPM_75V, Part Number=R0603_7.5k_1%_62.5mW_100PPM_75V, Pin Count=2
R216 R228: library part R0805_1k_1%_62.5mW_100PPM_150V, "resistor", Power Rating=62.5mW, Temperature Coefficient=±100ppm/°C, Tolerance=1%, Voltage Rating=150V, Assembly=SMT, Category="Film Resistor", Manufacturer Part Number=R0805_1k_1%_62.5mW_100PPM_150V, Part Number=R0805_1k_1%_62.5mW_100PPM_150V, Pin Count=2
R217 R220: library part R0603_0R_1%_62.5mW_100PPM_75V, "resistor", Power Rating=62.5mW, Temperature Coefficient=±100ppm/°C, Tolerance=1%, Voltage Rating=75V, Assembly=SMT, Category="Film Resistor", Manufacturer Part Number=R0603_0R_1%_62.5mW_100PPM_75V, Part Number=R0603_0R_1%_62.5mW_100PPM_75V, Pin Count=2
R218: library part R0805_0R_1%_62.5mW_100PPM_150V, "resistor", Power Rating=62.5mW, Temperature Coefficient=±100ppm/°C, Tolerance=1%, Voltage Rating=150V, Assembly=SMT, Category="Film Resistor", Manufacturer Part Number=R0805_0R_1%_62.5mW_100PPM_150V, Part Number=R0805_0R_1%_62.5mW_100PPM_150V, Pin Count=2
R219: library part R0603_6.65k_1%_62.5mW_100PPM_75V, "resistor", Power Rating=62.5mW, Temperature Coefficient=±100ppm/°C, Tolerance=1%, Voltage Rating=75V, Assembly=SMT, Category="Film Resistor", Manufacturer Part Number=R0603_6.65k_1%_62.5mW_100PPM_75V, Part Number=R0603_6.65k_1%_62.5mW_100PPM_75V, Pin Count=2
R221: library part R1206_0.025R_1%_250mW_100PPM_200V, "resistor", Power Rating=250mW, Temperature Coefficient=±100ppm/°C, Tolerance=1%, Voltage Rating=200V, Assembly=SMT, Category="Film Resistor", Manufacturer Part Number=R1206_0.025R_1%_250mW_100PPM_200V, Part Number=R1206_0.025R_1%_250mW_100PPM_200V, Pin Count=2
R222: library part R0603_15R_1%_62.5mW_100PPM_75V, "resistor", Power Rating=62.5mW, Temperature Coefficient=±100ppm/°C, Tolerance=1%, Voltage Rating=75V, Assembly=SMT, Category="Film Resistor", Manufacturer Part Number=R0603_15R_1%_62.5mW_100PPM_75V, Part Number=R0603_15R_1%_62.5mW_100PPM_75V, Pin Count=2
R223: library part R0603_100R_1%_62.5mW_100PPM_75V, "resistor", Power Rating=62.5mW, Temperature Coefficient=±100ppm/°C, Tolerance=1%, Voltage Rating=75V, Assembly=SMT, Category="Film Resistor", Manufacturer Part Number=R0603_100R_1%_62.5mW_100PPM_75V, Part Number=R0603_100R_1%_62.5mW_100PPM_75V, Pin Count=2
R225: library part R0603_10k_1%_62.5mW_100PPM_75V, "resistor", Power Rating=62.5mW, Temperature Coefficient=±100ppm/°C, Tolerance=1%, Voltage Rating=75V, Assembly=SMT, Category="Film Resistor", Manufacturer Part Number=R0603_10k_1%_62.5mW_100PPM_75V, Part Number=R0603_10k_1%_62.5mW_100PPM_75V, Pin Count=2
R226: library part R0805_37.4R_1%_62.5mW_100PPM_150V, "resistor", Power Rating=62.5mW, Temperature Coefficient=±100ppm/°C, Tolerance=1%, Voltage Rating=150V, Assembly=SMT, Category="Film Resistor", Manufacturer Part Number=R0805_37.4R_1%_62.5mW_100PPM_150V, Part Number=R0805_37.4R_1%_62.5mW_100PPM_150V, Pin Count=2
R227: library part R0603_2.2k_1%_62.5mW_100PPM_75V, "resistor", Power Rating=62.5mW, Temperature Coefficient=±100ppm/°C, Tolerance=1%, Voltage Rating=75V, Assembly=SMT, Category="Film Resistor", Manufacturer Part Number=R0603_2.2k_1%_62.5mW_100PPM_75V, Part Number=R0603_2.2k_1%_62.5mW_100PPM_75V, Pin Count=2
R229: library part R0603_107k_1%_62.5mW_100PPM_75V, "resistor", Power Rating=62.5mW, Temperature Coefficient=±100ppm/°C, Tolerance=1%, Voltage Rating=75V, Assembly=SMT, Category="Film Resistor", Manufacturer Part Number=R0603_107k_1%_62.5mW_100PPM_75V, Part Number=R0603_107k_1%_62.5mW_100PPM_75V, Pin Count=2
R230: library part R0603_51k_1%_62.5mW_100PPM_75V, "resistor", Power Rating=62.5mW, Temperature Coefficient=±100ppm/°C, Tolerance=1%, Voltage Rating=75V, Assembly=SMT, Category="Film Resistor", Manufacturer Part Number=R0603_51k_1%_62.5mW_100PPM_75V, Part Number=R0603_51k_1%_62.5mW_100PPM_75V, Pin Count=2
R231: library part R0603_26.1k_1%_62.5mW_100PPM_75V, "resistor", Power Rating=62.5mW, Temperature Coefficient=±100ppm/°C, Tolerance=1%, Voltage Rating=75V, Assembly=SMT, Category="Film Resistor", Manufacturer Part Number=R0603_26.1k_1%_62.5mW_100PPM_75V, Part Number=R0603_26.1k_1%_62.5mW_100PPM_75V, Pin Count=2
T1: "Flyback trnsformer 12V 3A, 2:1", Manufacturer="Wurth Elektronik", Voltage Rated=42-57Vdc, Assembly=SMT, Category=Flyback, Datasheet=https://www.we-online.com/components/products/datasheet/750316115.pdf, Manufacturer Part Number=750316115, Part Number=750316115, Pin Count=10, Turn Ratio=2:1:1
T2: "785ÂµH Pulse Transformer 1:1 Surface Mount", Manufacturer="Pulse Electronics", Voltage Rated=1500Vdc, Assembly=SMT, Category=XFAR, Datasheet=https://productfinder.pulseelectronics.com/api/open/part-attachments/datasheet/pe-68386nlt, Manufacturer Part Number=PE-68386NLT, Part Number=PE-68386NLT, Pin Count=4, Turn Ratio=1:1
U41: "Power Switch ICs - POE/LAN IEEE 802.3bt PD Int w/ For/Fly Cntr", Manufacturer="Analog Device", Manufacturer Part Number=LT4295IUFD#TRPBF, Package=QFN, Voltage Rated="57 V", Assembly=SMT, Category="POE Controller", Component Height=0.75mm, Datasheet=https://www.analog.com/media/en/technical-documentation/data-sheets/LT4295.pdf, Part Number=LT4295IUFD, Pin Count=28

## Via types
v1: diameter 0.65/0.65/0.65/0.65 (per signal layer), hole 0.3, Top Layer to Bottom Layer, tented both sides, 123 vias
v2: diameter 0.5/0.5/0.5/0.5 (per signal layer), hole 0.15, Top Layer to Bottom Layer, tented both sides, 91 vias

## Nets (pads, with @x,y where several pads share a name; then routed paths per layer and width w, separated by ;. In a path a pad name is that pad's centre, name@x,y a point inside that pad or via, vN(x,y) a via of type N, cw(c..) or ccw(c..) an arc to the next point about the centre after c; other vN are vias at no path point)
GND: C259.1 C260.1 C261.1 C272.2 C279.1 C291.1 C292.1 C293.1 D27.2 P2.1 P2.4 Q4.1 Q4.2 Q4.3 Q6.3 R211.1 R212.1 R225.1 T2.4 | length 17
  Bottom Layer w0.7: v1(38.379,11.679) 38.486,11.786 Q6.3@40.647,11.786 ; C259.1@44.301,1.184 C259.1
  Bottom Layer w1.1: C279.1 36.999,7.705 37.02,7.683 T2.4@37.02,7.239 ; P2.4@47.625,1.373 47.625,4.66 ; P2.4 48.15,1.522 48.478,1.85 C293.1@48.478,3.807 ; C261.1@51.283,7.579 51.322,7.579 51.322,9.358 R211.1@51.362,9.398
  Bottom Layer w1.6: R211.1@51.362,9.398 R212.1@51.362,11.963
  other v1: 40.97,0.864 41.656,0.864 42.367,0.864 43.104,0.864 45.847,0.864 46.406,0.864 46.965,0.864 45.847,1.422 46.406,1.422 46.965,1.422 55.956,7.569 55.956,8.433 55.956,9.271 38.379,9.881 53.873,10.058 54.458,10.058 55.067,10.058 55.677,10.058 38.379,10.48 53.873,10.668 54.458,10.668 55.067,10.668 55.677,10.668 38.379,11.079 53.873,11.278 54.458,11.278 55.067,11.278 55.677,11.278 53.873,11.887 54.458,11.887 55.067,11.887 55.677,11.887 38.379,12.278 38.379,12.878
  other v2: 37.998,6.274 37.998,6.807 37.998,7.341 37.998,7.874 37.998,8.407 38.252,9.042
NetC259_2: C259.2 C260.2 L10.2 T1.9 T1.10 | length 1.3
  Bottom Layer w1.1: C259.2 v1@45.806,3.084
  other v1: 45.822,3.099
NetC262_2: C262.2 D21.1 L11.1 R207.2 R208.2 R209.2 T1.5 U41.24 | length 5.3
  Top Layer w0.3: U41.24@12.612,10.559 U41.24 12.612,10.762 12.802,10.951 12.802,11.941
  Top Layer w0.8: C262.2@7.087,7.648 C262.2@7.087,8.001 ; L11.1@7.887,10.986 L11.1@7.893,10.979
  Top Layer w1.8: C262.2@7.08,8.007 7.08,11.043
  other v1: 28.575,11.938 28.575,12.548 28.575,13.157
  other v2: 9.068,13.284 9.576,13.284 10.084,13.284 10.617,13.284 11.125,13.284 11.659,13.284 12.192,13.284 12.725,13.284 13.259,13.284 23.647,13.284 24.155,13.284 24.663,13.284 25.197,13.284 25.705,13.284 26.238,13.284 26.772,13.284 27.305,13.284 27.838,13.284
NetC263_2: C263.2 L11.2 Q2.1 Q2.2 Q2.3 U41.25 | length 13.6
  Top Layer w0.254: U41.25@12.116,10.542 12.114,10.544 12.114,11.072 v2(12.116,11.074)
  Layer 1 w0.254: v1(1.092,12.573) 1.777,13.258
  Layer 1 w0.4: 1.194,13.259 5.842,13.259 6.909,12.192 11.379,12.192 12.109,11.462 v2@12.109,11.081
  Layer 2 w0.254: v1@1.067,9.525 v1@1.092,9.5 ; v2@12.109,11.081 v2(12.116,11.074)
  other v1: 1.092,9.525 1.092,10.135 1.092,10.744 1.092,11.354 1.092,11.963
NetC264_1: C264.1 Q5.MB T1.3
  other v1: 20.574,6.909 21.234,6.909 21.92,6.909 22.581,6.909 20.574,7.544 21.234,7.544 21.92,7.544 22.581,7.544
NetC264_2: C264.2 R208.1 R209.1 | length 5.5
  Bottom Layer w1.6: R208.1@24.359,9.09 27.049,9.09 27.049,8.99 27.079,8.96 C264.2
NetC265_1: C265.1 R211.2 R212.2 | length 2.5
  Bottom Layer w1.6: R211.2@48.562,9.323 R212.2
NetC265_2: C265.2 D24.2 Q4.MB T1.6 T1.7 T1.8 | length 3.6
  Top Layer w0.8: v1(39.243,8.331) 40.132,8.331 40.549,7.914 40.549,7.297 40.68,7.166 T1.8
  Bottom Layer w0.5: D24.2 39.209,8.27 39.243,8.304 v1(39.243,8.331)
  other v1: 44.628,11.963
NetC267_2: C267.2 R210.1 | length 1.6
  Bottom Layer w0.8: C267.2 2.4,8.13 2.401,8.128 R210.1
NetC270_2: C270.2 D26.1 R213.1 U41.28 | length 9.9
  Top Layer w0.4: v2(4.953,4.75) v2@4.963,4.759 ; C270.2@4.963,6.295 C270.2 ; v1(9.881,10.363) v1@9.909,10.334
  Top Layer w0.7: v2@4.963,4.759 C270.2@4.963,6.295
  Layer 2 w0.4: v1@9.833,10.315 v1(9.881,10.363)
  Layer 2 w0.5: v2(4.953,4.75) v2(4.953,5.258) 4.953,5.486 7.595,8.128 7.595,9.017 8.893,10.315 9.727,10.315 9.746,10.335 9.814,10.335 v1@9.833,10.315
NetC272_1: C272.1 Q7.3 R216.1 R218.1 | length 3.9
  Bottom Layer w1.1: 43.571,6.589 R218.1@47.478,6.589
NetC274_2: C274.2 R220.2 U41.17 | length 5.3
  Top Layer w0.3: U41.17 15.025,7.149 v2(15.037,7.137)
  Bottom Layer w0.3: v2(15.037,7.137) 15.494,7.137 16.394,6.238 16.394,5.559 16.438,5.515 C274.2@16.557,5.515 ; C274.2@16.451,5.359 16.451,4.668 16.627,4.492 17.03,4.492 R220.2@17.128,4.394
NetC276_1: C276.1 T2.1 | length 0.5
  Bottom Layer w1: T2.1@29.964,1.414 30.035,1.486 T2.1
NetC276_2: C276.2 R223.2
NetC277_1: C277.1 D27.1 R222.1 R225.2 | length 4.7
  Bottom Layer w0.8: C277.1 R222.1 ; 39.472,3.493 R225.2 42.373,3.493 D27.1
NetC277_2: C277.2 T2.6 | length 0.5
  Bottom Layer w0.8: T2.6 T2.6@36.767,1.745 ; T2.6@36.836,1.675 T2.6@36.767,1.745 ; T2.6@36.938,1.573 T2.6@36.767,1.745
NetC278_1: C278.1 R231.2 | length 1.2
  Bottom Layer w0.3: R231.2 R231.2@13.056,3.212
  Bottom Layer w0.8: R231.2@13.056,3.212 C278.1
NetC278_2: C278.2 C281.1 U41.13 | length 3.3
  Top Layer w0.3: U41.13 12.612,4.599 12.725,4.486 v2(12.725,4.445)
  Bottom Layer w0.3: v2(12.725,4.445) v2@12.766,4.445
  Bottom Layer w0.5: v2(12.725,4.445) 13.044,4.763 C278.2@13.868,4.763
  Bottom Layer w0.8: C278.2@13.868,4.763 C281.1
NetC282_2: C282.2 U41.11 | length 3.8
  Top Layer w0.3: v2(10.49,3.099) 11.29,3.898 11.29,4.228 11.612,4.551 U41.11
  Bottom Layer w0.3: C282.2 C282.2@9.792,3.099
  Bottom Layer w0.5: C282.2@9.792,3.099 v2(10.49,3.099)
NetD23_1: D23.1 L12.1 Q3.3 | length 0
  Top Layer w0.6: L12.1@19.863,10.096 L12.1@19.888,10.122
  other v1: 18.593,8.966 19.279,8.966 19.964,8.966 20.65,8.966 21.336,8.966
NetD24_1: D24.1 R216.2 | length 0.3
  Bottom Layer w0.7: R216.2@41.395,5.509 R216.2
NetD25_1: D25.1 R217.2 U41.20 | length 4.5
  Top Layer w0.3: U41.20 14.424,8.649 14.564,8.509 v2(14.605,8.509)
  Bottom Layer w0.3: D25.1@13.701,8.428 13.753,8.48 14.576,8.48 v2(14.605,8.509) 14.62,8.494 15.28,8.494 16.118,7.657 16.892,7.657 R217.2
NetQ2_4: Q2.4 R210.2 U41.26 | length 13.7
  Top Layer w0.254: v2@11.326,11.153 11.611,10.868 U41.26@11.611,10.335
  Layer 2 w0.254: v2(0.838,8.23) 0.856,8.23 1.262,7.823
  Layer 2 w0.4: 1.262,7.823 5.283,7.823 6.706,9.246 6.706,10.592 7.239,11.125 8.611,11.125 v2(11.278,11.125)
  other v2: 0.838,7.798
NetQ3_1: Q3.1 U41.23 | length 5.2
  Top Layer w0.4: U41.23@13.162,10.414 v1(14.783,10.414)
  Bottom Layer w0.7: v1(14.783,10.414) 14.783,11.201 15.757,12.176 Q3.1
NetQ3_2: Q3.2 R207.1
NetQ4_4: Q4.4 Q6.2 Q7.2 | length 13.9
  Bottom Layer w0.4: Q7.2@43.56,9.598 43.671,9.71 43.671,12.455 44.613,13.396 53.968,13.396 54.013,13.351 54.013,13.145 v1(54.051,13.106)
  Bottom Layer w0.6: Q6.2 Q6.2@42.659,10.795
  other v1: 54.661,13.106
NetQ5_1: Q5.1 Q5.2 Q5.3 R220.1 R221.2 | length 2.1
  Bottom Layer w0.3: R220.1@17.272,2.857 17.272,2.379 17.448,2.203 18.549,2.203 R221.2@18.746,2.007
NetQ5_4: Q5.4 R217.1 | length 2.1
  Bottom Layer w0.3: R217.1 R217.1@18.528,7.62
  Bottom Layer w0.4: R217.1@18.528,7.62 18.528,7.477 18.628,7.377 19.134,7.377 19.369,7.143 Q5.4@19.369,6.263
NetQ6_1: Q6.1 Q7.1 R222.2 | length 7.9
  Bottom Layer w0.5: R222.2@39.8,5.652 40.259,6.111 40.259,7.817 Q7.1@41.671,9.23 ; Q7.1 41.671,11.72 Q6.1
NetR214_1: R214.1 U41.12 | length 3.4
  Top Layer w0.3: v2(12.014,4.115) 12.014,4.155 12.112,4.253 U41.12
  Bottom Layer w0.3: R214.1@11.215,4.769 11.215,4.675 R214.1@11.465,4.425 ; R214.1 R214.1@11.342,4.902 ; v2@11.986,4.143 v2(12.014,4.115)
  Bottom Layer w0.5: R214.1@11.342,4.902 11.81,4.902 11.986,4.726 v2@11.986,4.143
NetR219_1: R219.1 R227.2 U41.14 | length 9.5
  Top Layer w0.3: U41.14 13.112,4.897 13.767,4.242 13.767,3.124 14.136,2.755 17.563,2.755 17.892,2.426 R227.2
  Top Layer w0.8: R227.2 20.332,2.426 R219.1
NetR219_2: R219.2 T1.1
NetR223_1: R223.1 U41.18 | length 21.6
  Top Layer w0.3: U41.18 14.695,7.649 14.818,7.772 v2(14.859,7.772)
  Layer 2 w0.5: v2(14.859,7.772) 15.443,8.357 15.443,9.449 16.485,10.49 26.01,10.49 28.524,7.976 v1(28.524,4.166)
  Bottom Layer w0.5: R223.1 R223.1@27.375,4.249
NetR226_2: R226.2 U41.3 | length 2.4
  Top Layer w0.3: v2@8.966,9.017 v2(8.915,9.017) 9.283,8.649 U41.3
  Bottom Layer w0.3: R226.2@7.732,9.068 R226.2@7.783,9.017
  Bottom Layer w0.5: R226.2@7.783,9.017 v2(8.915,9.017)
NetR228_2: R228.2 U41.4 | length 2.5
  Top Layer w0.3: v2(8.915,7.798) 9.267,8.149 U41.4
  Bottom Layer w0.5: R228.2 7.935,7.645 8.763,7.645 v2(8.915,7.798)
NetR229_2: R229.2 U41.10 | length 3.1
  Top Layer w0.3: R229.2@10.048,3.886 R229.2@10.148,3.986 ; R229.2@10.148,3.886 R229.2@10.148,3.986 ; R229.2 10.148,4.316 10.398,4.566 10.728,4.566 10.853,4.691 ; U41.10 11.112,4.95 10.853,4.691 ; R229.2@10.148,3.986 10.853,4.691
NetR230_2: R230.2 U41.15 | length 2.1
  Top Layer w0.3: U41.15 13.797,5.189 14.191,4.795 14.291,4.795 14.541,4.545 R230.2
POE_GND: C262.1 C263.1 C266.1 C267.1 C270.1 C271.1 C274.1 C279.2 C281.2 C282.1 D21.2 D23.2 D25.2 D26.2 P1.4 R214.2 R221.1 R226.1 R227.1 R228.1 R229.1 R230.1 R231.1 T1.2 T2.3 U41.1 U41.2 U41.16 U41.19 U41.29 | length 20.6
  Top Layer w0.254: v2(12.895,8.077) 12.948,8.077 v2@13.02,8.149
  Top Layer w0.3: C270.1@4.801,8.04 C270.1 ; v2@13.02,8.149 U41.19 ; U41.16 14.622,6.649 14.972,6.299 v2(15.011,6.299) ; v2(15.418,3.454) 15.446,3.483 15.826,3.483 16.002,3.659 16.002,4.406 R230.1
  Top Layer w0.5: C270.1@4.801,8.04 v2(4.801,8.712)
  Bottom Layer w0.3: v2(12.895,7.214) v2@12.901,7.208 ; v2(12.895,7.645) v2@12.924,7.674 ; v2(12.895,9.373) v2@12.924,9.401 ; v2(15.011,6.299) 15.04,6.271 15.04,6.081 15.301,5.82 15.301,5.509 15.451,5.359 15.451,4.412 16.358,3.505 16.358,1.905 17.526,0.737 20.066,0.737 v1(20.091,0.762) v1(20.726,0.762) v1(21.387,0.762)
  Bottom Layer w0.5: v2(11.379,2.159) 11.379,3.036 11.394,3.05 R231.1 ; v2@12.924,9.401 12.924,10.272 13.1,10.448 D25.2
  Bottom Layer w0.8: 8.153,4.775 R214.2 ; v2@12.907,7.202 C281.2
  other v1: 22.073,0.762 22.758,0.762 32.495,2.21 33.122,2.21 32.495,2.921 33.122,2.921 23.825,3.505 24.511,3.505 25.197,3.505 25.857,3.505 32.495,3.632 33.122,3.632 25.857,4.191 32.495,4.343 33.122,4.343 32.495,5.055 33.122,5.055 32.495,5.766 33.122,5.766 31.242,6.477 31.869,6.477 32.495,6.477 33.122,6.477 31.242,7.188 31.869,7.188 32.495,7.188 33.122,7.188 31.242,7.899 31.869,7.899 32.495,7.899 33.122,7.899 31.242,8.611 31.869,8.611 32.495,8.611 33.122,8.611 31.14,9.55 31.115,10.262 4.623,10.706 4.623,11.284 4.623,11.862 4.623,12.44
  other v2: 10.895,6.35 11.395,6.35 11.895,6.35 12.395,6.35 12.895,6.35 10.895,6.782 11.395,6.782 11.895,6.782 12.395,6.782 12.895,6.782 10.895,7.214 11.395,7.214 11.895,7.214 12.395,7.214 10.895,7.645 11.395,7.645 11.895,7.645 12.395,7.645 10.895,8.077 11.395,8.077 11.895,8.077 12.395,8.077 10.895,8.509 11.395,8.509 11.895,8.509 12.395,8.509 12.895,8.509 10.895,8.941 11.395,8.941 11.895,8.941 12.395,8.941 12.895,8.941 16.561,8.992 17.094,8.992 10.895,9.373 11.395,9.373 11.895,9.373 12.395,9.373 22.581,9.5
poe_nc1: P1.3
poe_nc2: P1.2
poe_nc3: P1.1
poe_nc5: P2.2
POE_VCC: C266.2 L12.2 U41.6 U41.7 U41.8 U41.9 U41.21 | length 3.6
  Top Layer w0.3: U41.21 14.833,9.149 15.709,8.273 15.709,7.962 16.308,7.363 C266.2@16.497,7.363
  other v2: 17.602,5.69 8.992,5.842 17.374,6.045 17.805,6.045 8.992,6.375 8.992,6.934
VCC_12V: C261.2 C291.2 C292.2 C293.2 L10.1 P2.3 R218.2
  other v1: 52.299,3.302 51.46,3.327 51.46,3.975 52.299,3.962 51.46,4.623 52.299,4.623 52.451,5.41 52.451,6.045
VPORTP: C271.2 P1.5 Q2.MB R213.2
  other v1: 0.838,1.041 1.473,1.041 2.108,1.041 0.864,1.626 1.499,1.626 2.108,1.626
pads on no net: T1.4 U41.5 U41.22 U41.27

## Polygon pours and split planes (outlines as drawn)
GND on Layer 1 "L1_GND" (solid, pour order 0): 37.668,13.945 56.82,13.945 56.82,0 37.668,0
POE_GND on Layer 1 "L1_POE_GND" (solid, pour order 6): 33.757,14 33.757,0.305 4.877,0.305 4.877,4.039 0.483,4.039 0.533,4.089 0.533,6.96 2.591,6.96 3.277,7.645 3.277,14
POE_GND on Layer 2 "L2_POE_GND" (solid, pour order 5): 3.175,13.691 3.175,9.373 4.775,7.772 4.775,0.305 33.655,0.305 33.655,13.691
GND on Layer 2 "L2_GND" (solid, pour order 9): 37.668,13.945 56.82,13.945 56.82,0.102 37.668,0.102
POE_GND on Top Layer "TOP_POE_GND" (solid, pour order 10): 23.368,5.232 27.203,5.232 27.203,9.068 28.778,10.643 33.807,10.643 33.807,0.508 27.407,0.508 27.407,1.803 26.035,3.175 23.368,3.175

## Keep-outs
Keep-Out Layer:
  the board outline again, w0.508

## Other copper
Top Layer:
  region net NetC262_2: 28.981,11.532 9.703,11.532 8.56,10.389 8.56,9.601 6.096,9.601 6.096,13.589 28.981,13.589
  region net POE_GND: 17.374,10.922 17.374,8.738 16.129,8.738 15.545,9.322 15.545,10.922
  region net NetR219_2: 25.273,2.692 25.273,1.524 23.368,1.524 22.987,1.905 21.412,1.905 21.412,2.921 22.885,2.921 23.114,2.692
  region net NetC259_2: 39.7,1.524 42.266,1.524 43.053,2.311 46.431,2.311 48.59,4.47 48.59,8.636 45.974,8.636 42.774,5.436 39.7,5.436
  region net GND: 38.71,13.233 38.71,9.068 38.278,8.636 38.278,5.994 37.719,5.994 37.719,13.233
  region net NetR219_1: 20.752,2.921 20.752,1.905 18.491,1.905 18.491,2.921
  region net POE_VCC: 21.768,5.334 21.768,3.937 17.932,3.937 17.932,4.369 15.545,6.515 15.545,8.128 17.374,8.128 17.374,7.493 19.685,5.334 19.761,5.334
  region net VPORTP: 0.508,6.972 3.835,6.972 3.835,4.064 5.817,2.083 5.817,0.533 0.508,0.533
  region net POE_GND: 18.491,1.321 18.491,0.406 23.089,0.406 23.089,1.092 19.736,1.092 19.507,1.321
  region net POE_GND: 6.045,5.817 6.045,2.87 6.439,2.476 6.439,0.508 8.611,0.508 8.611,2.388 9.042,2.819 9.042,4.75 7.976,5.817
  region net VCC_12V: 49.657,0.838 50.089,0.406 51.562,0.406 52.07,0.914 52.07,1.956 52.832,2.718 55.118,2.718 55.118,8.714 51.714,8.714 49.657,6.657 49.657,4.242
  region net GND: 54.889,2.21 54.889,0.508 56.591,0.508 56.591,12.471 52.68,12.471 52.629,12.421 52.629,9.525 55.626,9.525 55.626,2.21
  region net POE_GND: 9.55,9.716 10.895,9.716 10.895,8.992 9.55,8.992
  region net NetC270_2: 10.744,10.719 9.779,10.719 9.576,10.516 9.576,9.982 10.744,9.982
  region net POE_VCC: 10.77,5.842 10.77,5.08 9.423,5.08 8.687,5.817 8.687,7.29 10.287,7.29 10.312,7.264 10.312,5.969 10.439,5.842
  region net NetC264_1: 20.193,7.925 25.4,7.925 25.4,6.274 20.193,6.274 20.193,6.299
  region net NetD23_1: 18.212,10.795 21.768,10.795 21.768,8.661 18.212,8.661
  region net GND: 48.997,2.438 48.997,0.406 39.827,0.406 39.827,1.194 42.875,1.194 43.51,1.829 46.711,1.829 47.32,2.438
  region net NetC263_2: 3.531,13.208 3.531,7.569 1.829,7.569 1.829,8.89 0.762,9.246 0.762,13.208
  region net NetQ2_4: 0.559,8.484 1.587,8.484 1.587,7.544 0.559,7.544
  region net NetC265_2: 39.649,13.106 39.751,13.106 52.07,13.106 52.07,9.677 45.593,9.677 42.24,6.325 39.649,6.325 39.649,13.081
  region net NetQ4_4: 52.629,12.675 53.721,12.675 53.823,12.776 54.991,12.776 54.991,13.437 52.629,13.437
Layer 1:
  region net POE_GND: 6.301,0.761 6.301,0.557 6.35,0.508 8.738,0.508 8.738,0.722 8.839,0.824 8.839,0.87 6.411,0.87
  region net VCC_12V: 52.095,0.559 49.733,0.559 49.733,6.528 52.883,6.528 52.883,2.921 52.527,2.921 52.095,2.489
  region net NetQ4_4: 53.746,13.437 54.991,13.437 54.991,12.751 53.746,12.751
  region net GND: 54.28,2.21 54.28,0.533 56.591,0.533 56.591,13.239 55.886,13.239 55.651,13.005 55.651,9.525 55.651,2.21
  region net POE_GND: 16.459,0.875 16.459,0.432 33.757,0.432 33.757,0.761 16.574,0.761
  region net POE_VCC: 18.034,6.274 18.034,5.766 17.729,5.461 17.424,5.461 17.145,5.74 17.145,6.274
  region net GND: 37.668,0.533 49.225,0.533 49.225,1.93 48.641,1.93 37.668,1.93
  region net POE_VCC: 8.611,7.29 9.347,7.29 9.347,5.486 8.611,5.486
  region net NetC264_1: 20.193,7.899 22.962,7.899 22.962,6.452 20.193,6.452
  region net NetD23_1: 18.237,9.398 21.692,9.398 21.692,8.56 18.237,8.56
  region net NetC262_2: 8.611,12.954 27,12.954 28.423,11.532 29.159,11.532 29.337,11.709 29.337,13.589 8.611,13.589
  region net VPORTP: 5.791,0.508 0.508,0.508 0.508,2.388 5.791,2.388
  region net NetQ2_4: 0.533,8.534 1.93,8.534 1.93,7.544 0.533,7.544
  region net NetC263_2: 0.533,13.462 1.93,13.462 1.93,9.093 0.533,9.093
  pour cut-out: 13.945,9.144 15.723,9.144 15.723,5.664 13.945,5.664
Layer 2:
  region net POE_GND: 6.325,1.295 6.325,0.533 6.35,0.508 8.738,0.508 8.738,0.722 8.839,0.824 8.839,0.87 6.436,0.87 6.326,0.761
  region net VCC_12V: 52.095,0.559 49.733,0.559 49.733,6.528 52.883,6.528 52.883,2.921 52.527,2.921 52.095,2.489
  region net NetQ4_4: 53.721,13.437 54.991,13.437 54.991,12.751 53.721,12.751
  region net GND: 54.28,2.21 54.28,0.533 56.591,0.533 56.591,13.239 55.886,13.239 55.651,13.005 55.651,9.525 55.651,2.21
  region net VPORTP: 0.508,6.401 3.835,6.401 3.835,4.064 5.817,2.083 5.817,0.533 0.508,0.533
  region net POE_GND: 16.459,0.875 16.459,0.432 33.655,0.432 33.655,0.761 16.574,0.761
  region net GND: 37.668,0.533 49.225,0.533 49.225,1.93 48.641,1.93 37.668,1.93
  region net NetC262_2: 8.636,13.552 8.636,12.217 26.949,12.217 28.016,11.151 29.286,11.151 30.15,12.014 30.15,13.552
  pour cut-out: 13.945,9.144 15.723,9.144 15.723,5.664 13.945,5.664
  region net NetD23_1: 18.237,9.398 21.692,9.398 21.692,8.56 18.237,8.56
  region net NetC264_1: 20.193,7.899 22.962,7.899 22.962,6.452 20.193,6.452
  region net NetC263_2: 0.559,13.132 1.676,13.132 1.676,9.119 1.651,9.093 0.559,9.093
  region net NetQ2_4: 0.584,8.496 1.575,8.496 1.575,7.404 0.584,7.404
  region net POE_VCC: 8.611,7.239 9.607,7.239 10.185,5.69 16.764,5.69 17.043,5.969 17.043,6.35 18.161,6.35 18.161,4.902 17.958,4.902 17.475,4.902 8.611,4.902
Bottom Layer:
  region net POE_GND: 17.348,9.296 17.348,8.712 16.307,8.712 16.307,9.296
  region net GND: 44.856,4.14 44.856,5.232 48.133,5.232 49.022,4.343 49.022,4.14 46.482,4.14
  region net NetC276_2: 27.762,2.21 27.559,2.21 27.051,1.702 27.051,0.508 26.264,0.508 26.264,1.981 26.746,2.464 26.746,3.048 27.762,3.048
  region net NetC276_1: 27.762,1.524 29.058,1.524 29.058,2.54 29.464,2.946 30.607,2.946 30.607,0.508 27.762,0.508
  region net NetR223_1: 28.854,4.521 28.854,3.708 26.746,3.708 26.746,4.521
  region net POE_GND: 26.187,4.597 26.187,3.073 25.578,3.073 25.298,2.794 25.298,0.432 20.98,0.432 20.98,3.2 21.184,3.404 23.114,3.404 23.774,4.064 24.359,4.064 24.892,4.597
  region net GND: 39.116,13.233 39.116,9.474 38.278,8.636 38.278,5.994 36.017,5.994 36.017,6.248 36.017,13.233
  region net POE_GND: 8.508,0.584 6.582,0.584 6.582,4.87 5.174,6.649 3.479,6.649 3.479,9.672 3.708,9.9 4.292,10.485 4.292,13.025 6.679,13.024 6.679,6.573 7.695,5.455 8.508,5.455 8.508,2.915
  region net POE_GND: 31.775,6.147 31.775,1.803 33.604,1.803 33.604,6.147
  region net NetC265_1: 45.161,9.931 45.161,8.306 49.352,8.306 49.352,9.931
  region net NetC265_2: 46.99,12.725 44.886,12.725 44.323,12.243 44.323,11.379 44.577,11.252 44.856,11.1 46.99,11.1
  region net NetQ4_4: 42.291,11.1 43.866,11.1 43.866,9.195 43.256,9.195 43.256,9.525 42.291,10.49
  region net NetC277_1: 38.964,4.521 39.98,4.521 39.98,2.413 38.964,2.413
  region net NetC277_2: 36.195,0.914 39.98,0.914 39.98,1.753 37.897,1.753 37.338,2.311 37.338,2.946 36.195,2.946
  region net POE_GND: 22.276,10.325 22.911,10.325 22.911,9.233 22.276,9.233
  region net POE_VCC: 18.059,6.299 18.059,5.791 17.704,5.436 17.45,5.436 17.12,5.766 17.12,6.299
  region net NetC264_1: 25.07,7.163 23.393,7.163 23.012,7.544 23.012,8.001 20.218,8.001 20.218,4.089 22.809,4.089 23.368,4.648 23.368,5.309 25.07,5.309
  region net VPORTP: 0.508,3.785 5.893,3.785 5.893,0.533 0.508,0.533
  region net POE_GND: 19.812,1.092 19.812,0.432 19.837,0.432 20.98,0.432 20.98,1.092
  region net NetQ5_1: 19.812,5.817 19.812,3.581 19.99,3.404 19.99,1.6 18.237,1.6 18.237,5.232 18.821,5.817
  region net GND: 54.407,2.108 54.407,0.508 56.591,0.508 56.591,12.268 52.857,12.268 52.349,12.776 50.546,12.776 50.546,7.01 54.788,7.01 54.788,2.489
  region net NetC262_2: 30.455,13.589 21.692,13.589 21.692,11.1 30.455,11.1
  region net NetQ4_4: 53.721,13.589 54.991,13.589 54.991,12.751 53.721,12.751
  region net NetC272_1: 42.316,7.899 43.155,7.899 44.044,7.01 44.044,4.572 42.951,4.572 42.926,4.597 42.926,6.782 42.824,6.883 42.316,6.883
  region net NetD24_1: 40.996,7.315 41.605,7.315 41.605,6.858 42.164,6.299 42.164,4.547 40.996,4.547
  region net POE_GND: 33.604,5.944 29.185,5.944 29.159,5.969 29.159,10.363 30.632,10.363 31.801,11.532 31.801,13.259 33.604,13.259
  region net POE_GND: 6.629,12.852 4.293,12.852 4.293,10.312 6.629,10.312
  region net POE_GND: 13.187,9.724 13.187,6.074 10.537,6.074 10.537,9.374 10.887,9.724
  region net NetC263_2: 3.175,12.954 0.66,12.954 0.66,9.169 1.499,9.169 2.362,10.312 1.676,10.312 3.175,10.312
  region net POE_VCC: 8.89,7.188 8.712,7.01 8.712,5.69 8.839,5.563 9.195,5.563 9.322,5.69 9.322,6.985 9.119,7.188
  region net NetC262_2: 8.788,13.538 13.767,13.538 13.767,12.878 8.788,12.878
  region net NetQ3_2: 20.904,13.106 20.904,11.582 18.72,11.582 18.72,13.106
  region net NetC270_2: 2.997,5.512 3.251,5.766 5.258,5.766 5.258,4.394 0.787,4.394 0.787,5.512
  region net NetD23_1: 17.78,10.541 17.78,8.585 21.768,8.585 21.768,10.541
  region net GND: 40.589,2.388 43.078,2.388 43.434,2.032 49.022,2.032 49.022,0.406 40.589,0.406